# EAGLE board VoltageRegulator (EAGLE 7.2.0)
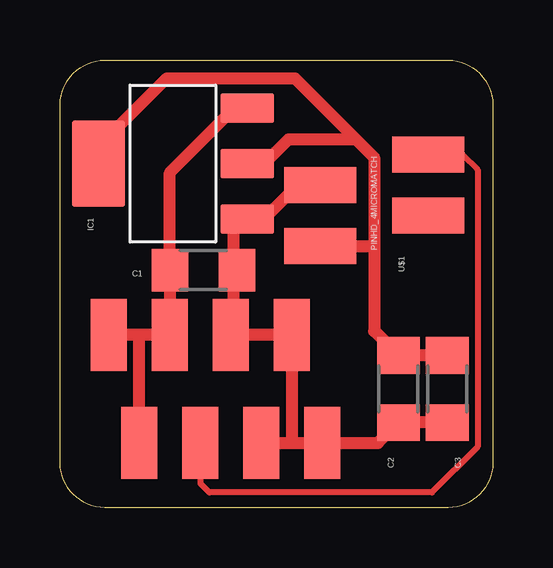
[diagram p0: board, top side]

Size 18.04 x 18.68 mm. Coordinates in mm from the lower left corner, seen from the top.
Outline: 18.04,16.64 18.04,2.04 arc-98 16.01,0 2.04,0 arc-98 0,2.04 0,16.64 arc-98 2.04,18.67 16.01,18.67 arc-98 18.04,16.64
Copper layers (1*16): Top 0.035mm / dielectric 1.5mm / Bottom 0.035mm
Design rules "we-dru": minimum track width 0.15mm, minimum drill 0.3mm, track to track 0.15mm, track to pad 0.15mm, pad to pad 0.15mm, via to via 0.15mm, smd to smd 0.1mm, copper to edge 0.5mm, drill to drill 0.2mm, minimum pad ring 0.18mm, minimum via ring 0.2mm, stop-mask expansion 0.1mm, vias tented up to drill 0.5mm, thermal gap 0.25mm

## Footprints (pad centres in the part's own frame; a part is rotated, then mirrored left to right if it is on the bottom)
1206 = smd 1.524 x 1.778: 1 -1.397,0; 2 1.397,0
SOT223 = smd 2.235 x 1.219: 1 -3.099,2.311; 2 -3.099,0; 3 -3.099,-2.311 | smd 2.2 x 3.6: 4 3.099,0
MICROMATCH4P0L = smd 1.5 x 3: P$1 -1.905,2.25; P$2 -0.635,-2.25; P$3 0.635,2.25; P$4 1.905,-2.25
MICROMATCH8POL = smd 1.5 x 3: P$1 -4.445,2.25; P$2 -3.175,-2.25; P$3 -1.905,2.25; P$4 -0.635,-2.25; P$5 0.635,2.25; P$6 1.905,-2.25; P$7 3.175,2.25; P$8 4.445,-2.25

## Placement (x,y rotation side)
C1  100n  [1206]  5.97,9.91 0 top
C2  10µ  [1206]  14.1,4.96 270 top
C3  10µ  [1206]  16.13,4.96 270 top
IC1  LDO-TS1117-3V3  [SOT223]  4.7,14.35 180 top
U$1  PINHD_4MICROMATCH  [MICROMATCH4P0L]  13.08,12.83 270 top
U$3  PINHD_8MICROMATCH  [MICROMATCH8POL]  6.48,4.96 0 top

## Library data of the parts
C1-C3 U$1 U$3 = thar
IC1 = we-power

## Nets
1.8V: C2.1 C3.1 IC1.2 IC1.4 U$1.P$4
GND: C1.2 C2.2 C3.2 IC1.1 U$1.P$2 U$3.P$5 U$3.P$6 U$3.P$7 U$3.P$8
RST: U$1.P$3
TST: U$1.P$1 U$3.P$4
VCC: C1.1 IC1.3 U$3.P$1 U$3.P$2 U$3.P$3

## Tracks (layer width: path | path; a pad name or v marks a point on that pad's centre or on a via)
1.8V
  Top 0.508: IC1.2 8.51,14.35 9.53,15.37 12.32,15.37 | 12.32,15.37 13.08,14.61 13.08,10.8 | 13.08,10.8 13.08,7.37 C2.1 C3.1 | U$1.P$4 12.96,10.93 13.08,10.8 | IC1.4 1.6,15.07 4.45,17.91 9.78,17.91 12.32,15.37
GND
  Top 0.508: U$3.P$6 9.53,2.71 | 9.53,2.71 U$3.P$8 13.25,2.71 C2.2 C3.2 | 9.53,2.71 9.66,2.83 U$3.P$7 U$3.P$5 7.21,7.21 7.24,7.24 7.24,9.91 C1.2 7.24,10.04 7.24,12.07 7.78,12.07 IC1.1 8.49,12.04 9.91,13.47 U$1.P$2
TST
  Top 0.254: U$1.P$1 16.77,14.74 17.4,14.1 17.4,2.54 15.5,0.64 6.23,0.64 5.85,1.02 U$3.P$4
VCC
  Top 0.508: 3.43,7.21 U$3.P$3 C1.1 4.58,13.97 7.27,16.67 IC1.3 | 3.43,7.21 U$3.P$1 | U$3.P$2 3.31,7.08 3.43,7.21